# Altium PCB PCB1.PcbDoc
Units mil, origin at the board's own origin, x right, y up, seen from the top; angles counter-clockwise.
Board outline 7088 x 5017 mil, 2 copper layers (Top Layer, Bottom Layer); 122 components, 84 nets, 321 pads, 44 vias.
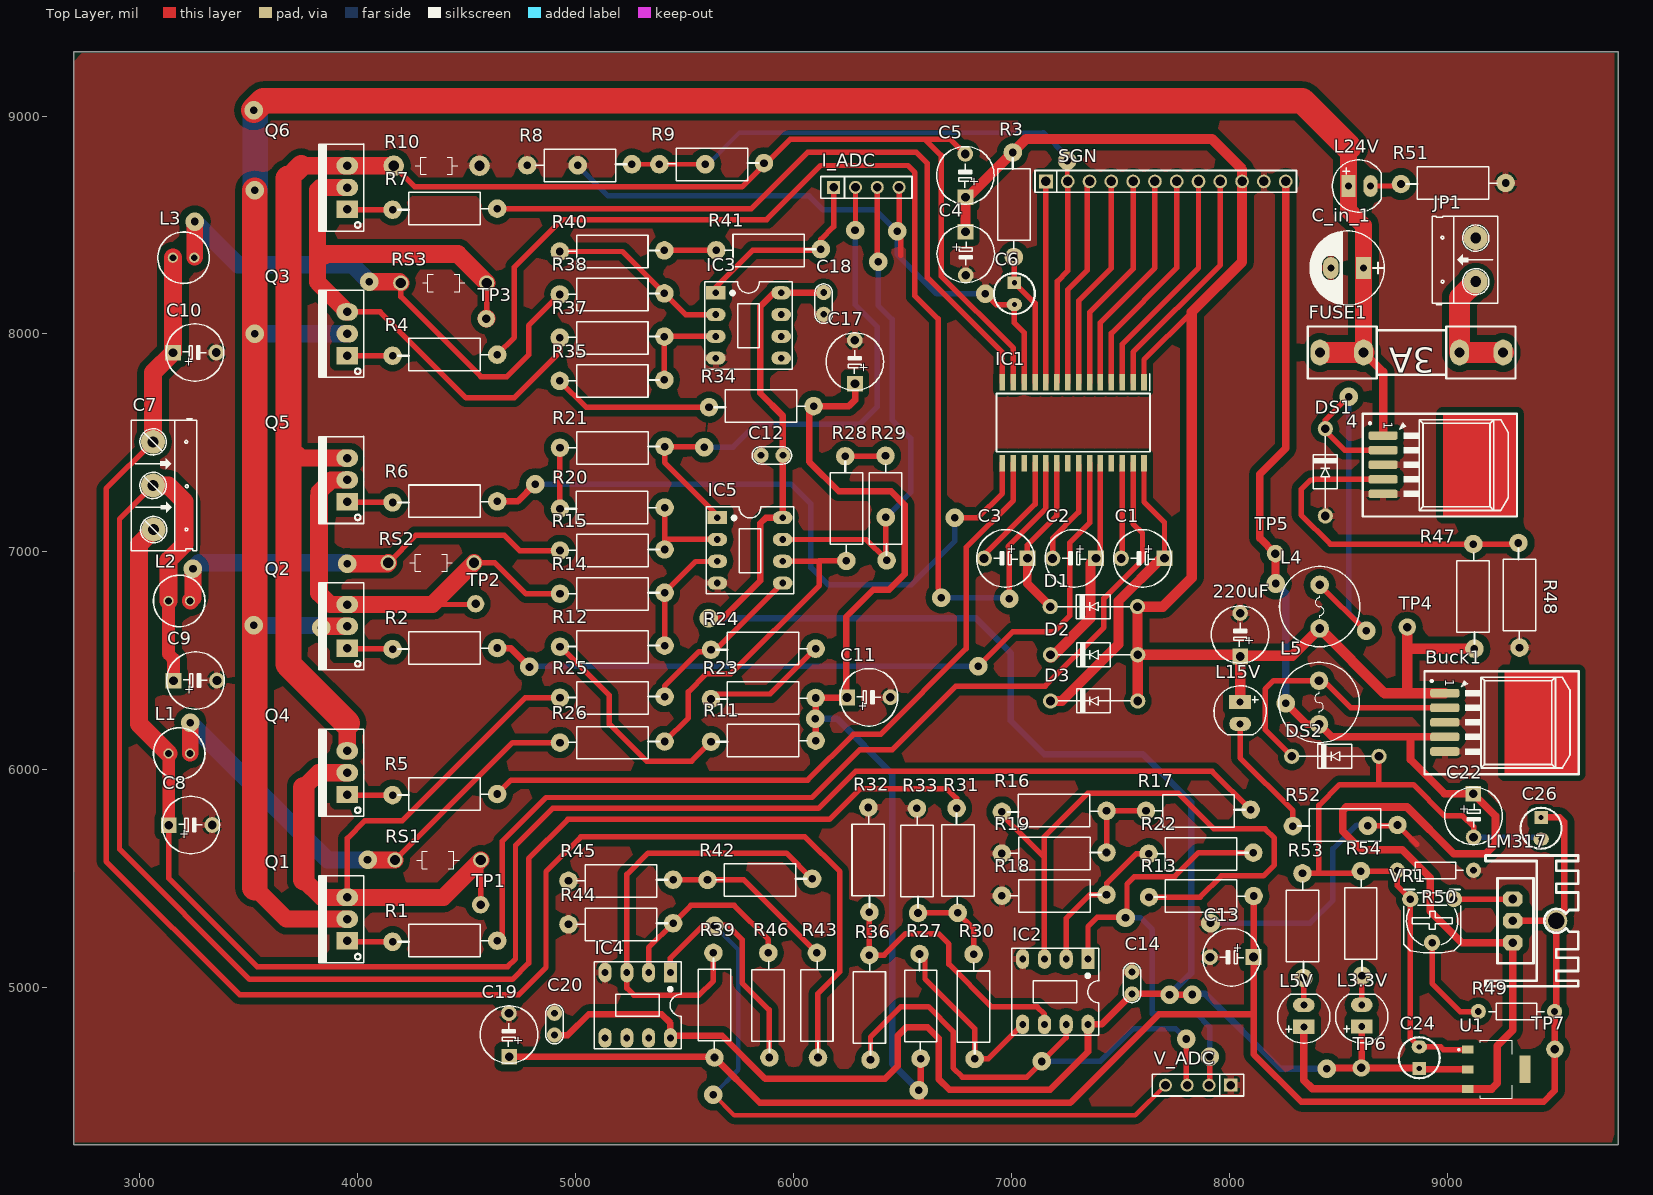
[diagram p0: Top Layer view]
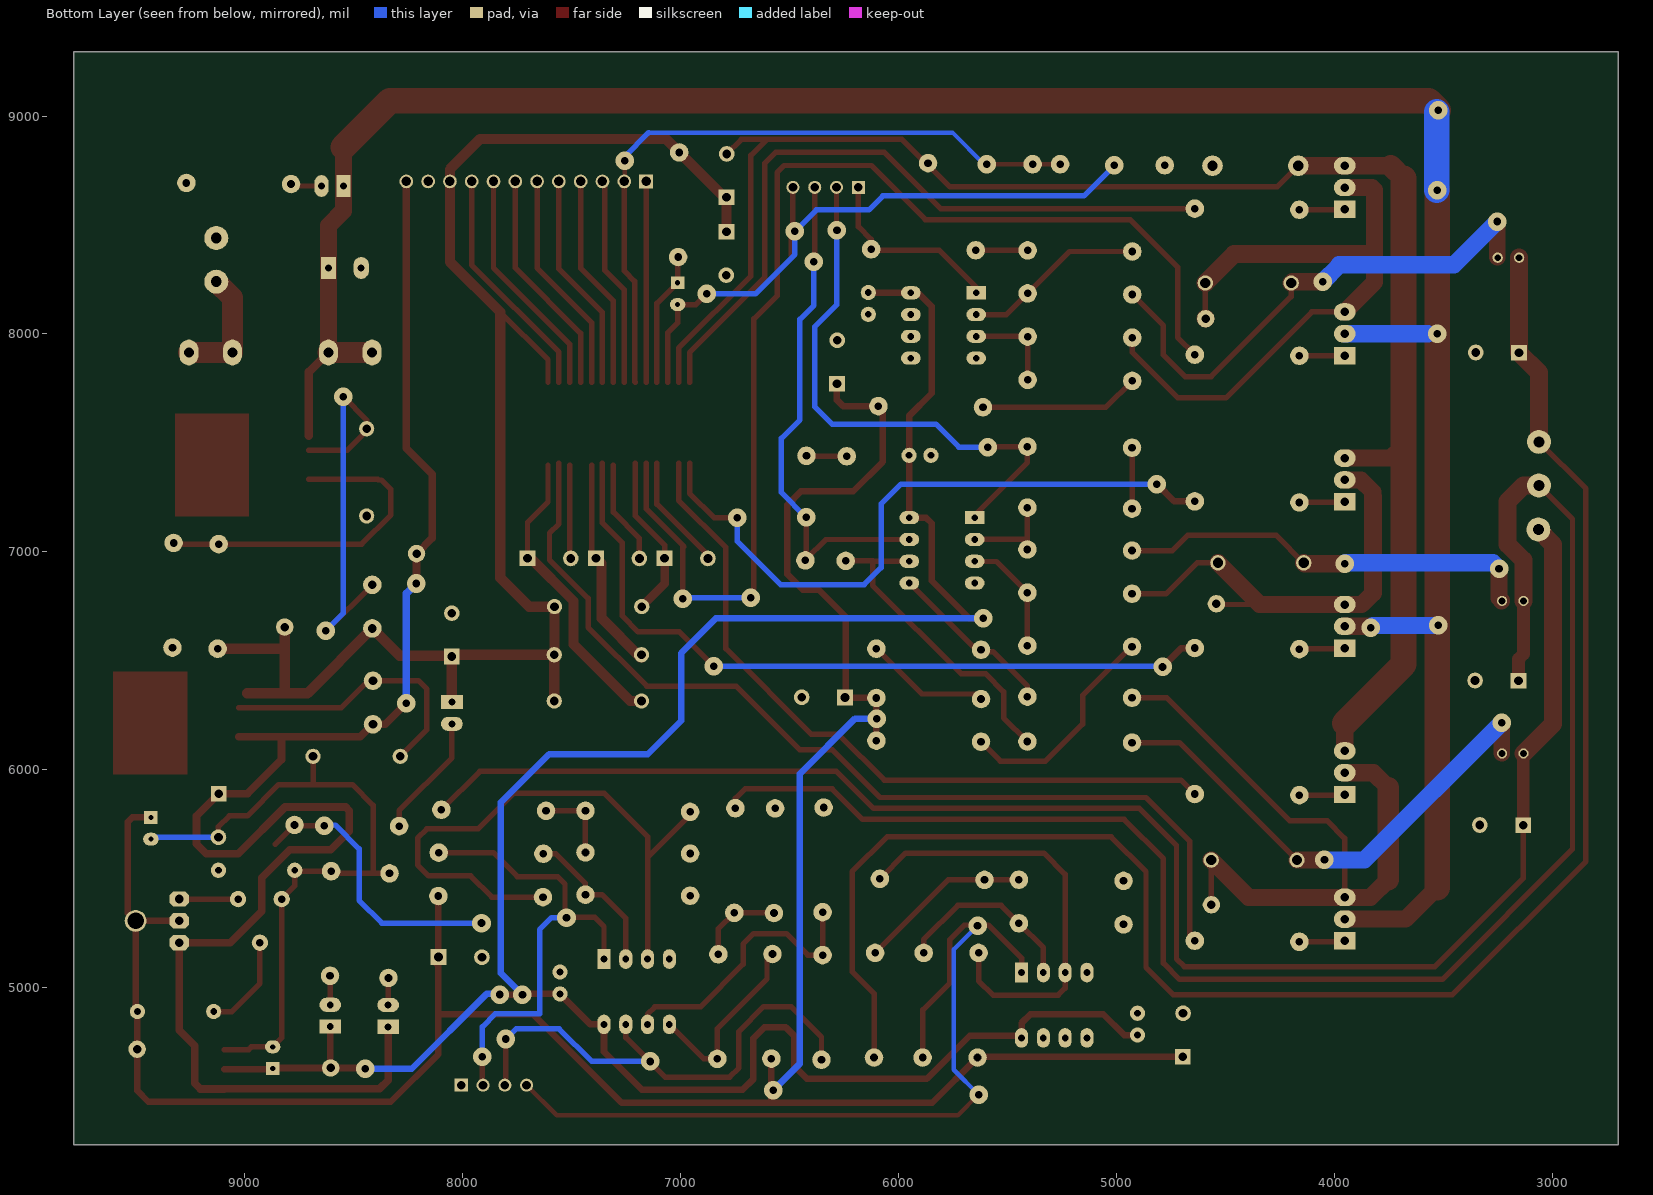
[diagram p1: Bottom Layer view, seen from below]

## Layer stack, top to bottom
Top Solder: solder mask 0.4, Solder Resist, Dk 3.5
Top Layer: signal copper 1.4
Dielectric 1: dielectric 12.6, FR-4, Dk 4.8
Bottom Layer: signal copper 1.4
Bottom Solder: solder mask 0.4, Solder Resist, Dk 3.5

## Board outline
2696,4279 2696,9296 9784,9296 9784,4279

## Design rules (kind name [scope] priority, off if disabled: settings)
Clearance [All] p1: gap=20 ignorepadtopadclearanceinfootprint=FALSE
PolygonConnect [All] p1: connectstyle=Relief reliefconductorwidth=30 reliefentries=4 polygonreliefangle="90 Angle" airgapwidth=10
RoomDefinition Source [InComponentClass('Source')] p1: confinementstyle=ConfineIn formatcopy=TRUE lockcomponents=FALSE outline 0,0 2000,0 2000,1000 0,1000
RoomDefinition Sheet2 [InComponentClass('Sheet2')] p2: confinementstyle=ConfineIn formatcopy=TRUE lockcomponents=FALSE outline 0,0 2000,0 2000,1000 0,1000
RoomDefinition Sheet1 [InComponentClass('Sheet1')] p3: confinementstyle=ConfineIn formatcopy=TRUE lockcomponents=FALSE outline 0,0 2000,0 2000,1000 0,1000
RoutingVias [All] p1: holewidth=28 width=50 viastyle="Through Hole" minholewidth=28 minwidth=50 maxholewidth=28 maxwidth=50
SolderMaskExpansion [All] p1: expansion=4
Width [All] p1: maxlimit=196.85 minlimit=20 preferedwidth=20
30 further rules are at their usual default settings.

## Classes and differential pairs
component class Source: 4 220uF Buck1 C22 C24 C26 C_in_1 DS1 DS2 FUSE1 JP1 L3.3V L4 L5 L5V L15V L24V LM317 R47 R48 R49 R50 R51 R52 R53 R54 TP4 TP5 TP6 TP7 U1 VR1
component class Sheet2: C11 C12 C13 C14 C17 C18 C19 C20 IC2 IC3 IC4 IC5 R11 R12 R13 R14 R15 R16 R17 R18 R19 R20 R21 R22 R23 R24 R25 R26 R27 R28 R29 R30 R31 R32 R33 R34 R35 R36 R37 R38 R39 R40 R41 R42 R43 R44 R45 R46
component class Sheet1: C1 C2 C3 C4 C5 C6 C7 C8 C9 C10 D1 D2 D3 IC1 L1 L2 L3 Q1 Q2 Q3 Q4 Q5 Q6 R1 R2 R3 R4 R5 R6 R7 R8 R9 R10 RS1 RS2 RS3 TP1 TP2 TP3
component class KIT_STM32F4: I_ADC SGN V_ADC

## Components (designator, comment, footprint, x,y, rotation, side; value= is the part's Value field where it differs from the comment)
4 "LM2576-ADJ" TO263 8939,7415 r270 top
220uF "CN-ALU-DIP" CA-ALU-5R 8048,6619 r90 top value=104
Buck1 "LM2576-5V" TO263 9222,6233 r270 top
C1 "50-100uF" CA-ALU-5R 7602,6970 r180 top value=104
C2 "50-100uF" CA-ALU-5R 7287.5,6970 r180 top value=104
C3 "50-100uF" CA-ALU-5R 6973,6970 r180 top value=104
C4 "to" CA-ALU-5R 6789,8370 r270 top value=104
C5 "to" CA-ALU-5R 6787,8726 r90 top value=104
C6 "1nF-2ms" CA-ALU-2.54 7012,8185 r270 top value=104
C7 "Header 3" HED3 3060,7505 r270 top
C8 "10uF" CA-ALU-5R 3231,5747 r0 top value=104
C9 "10uF" CA-ALU-5R 3253,6410 r0 top value=104
C10 "10uF" CA-ALU-5R 3250,7915 r0 top value=104
C11 "10uF" CA-ALU-5R 6343,6333 r0 top value=104
C12 "1uF" CN1 5950,7443 r180 top value=100pF
C13 "10uF" CA-ALU-5R 8010,5140 r180 top value=104
C14 "1uF" CN1 7552,4972 r90 top value=100pF
C17 "10uF" CA-ALU-5R 6280,7871 r90 top value=104
C18 "1uF" CN1 6137,8190 r270 top value=100pF
C19 "10uF" CA-ALU-5R 4693,4783 r90 top value=104
C20 "1uF" CN1 4902,4783 r90 top value=100pF
C22 ">400uF" CA-ALU-5R 9119,5791 r270 top value=104
C24 "22uF" CA-ALU-2.54 8870,4679 r90 top value=104
C26 "1uF" CA-ALU-2.54 9429,5732 r270 top value=104
C_in_1 "100->220uF" CP1.5/3.4 8614,8303 r180 top value=1000uF/16V
D1 "Diode" DIO-1A 7577,6749 r180 top value=1N5007
D2 "Diode" DIO-1A 7578,6528 r180 top value=1N5007
D3 "Diode" DIO-1A 7578,6316 r180 top value=1N5007
DS1 "Diode" DIO-1A 8439,7165 r90 top value=1N5007
DS2 "Diode" DIO-1A 8685,6062 r180 top value=1N5007
FUSE1 "F1A" Fuse1 8834,7915 r180 top value=Fuse
I_ADC "JP4" JP4-C1T 6183,8673 r0 top
IC1 "IR2136SPBF" SOIC127P1032X265-28N 7282,7593 r270 top
IC2 "LM358" DIP8 7205,4982 r180 top
IC3 "LM358" DIP8 5792,8044 r270 top
IC4 "LM358" DIP8 5289,4920 r180 top
IC5 "LM358" DIP8 5799,7012 r270 top
JP1 "Header 2_1" HED2 9129,8240 r90 top value="Header 2"
L1 "L-Filter" L-DIP-M-5.3 3180,6075 r180 top value="150 mH"
L2 "L-Filter" L-DIP-M-5.3 3180,6775 r180 top value="150 mH"
L3 "L-Filter" L-DIP-M-5.3 3200,8350 r180 top value="150 mH"
L3.3V "LED" LED-5-BLUE 8606,4867 r90 top value="LED 3 ly Single Colour"
L4 "100uH" L01 8413,6749 r270 top value="150 mH"
L5 "" L01 8410,6309 r270 top value="150 mH"
L5V "LED" LED-5-BLUE 8340,4866 r90 top value="LED 3 ly Single Colour"
L15V "LED" LED-5-BLUE 8048,6266 r270 top value="LED 3 ly Single Colour"
L24V "LED" LED-5-BLUE 8591,8679 r0 top value="LED 3 ly Single Colour"
LM317 "LM317-ADJ" TO220H3 9299,5407 r270 top value=LM317
Q1 "IRF840" TO220-123 3951,5215 r90 top
Q2 "IRF840" TO220-123 3951,6558.6 r90 top
Q3 "IRF840" TO220-123 3951,7901 r90 top
Q4 "IRF840" TO220-123 3951,5886.8 r90 top
Q5 "IRF840" TO220-123 3951,7230.4 r90 top
Q6 "IRF840" TO220-123 3951,8572 r90 top
R1 "10->20 Ohm" RES-1/2W 4379,5216 r0 top
R2 "1K10->20 Ohm" RES-1/2W 4379,6559 r0 top
R3 "2MOhm 2ms" RES-1/2W 7010,8613 r270 top
R4 "10->20 Ohm" RES-1/2W 4379,7905 r0 top
R5 "10->20 Ohm" RES-1/2W 4379,5889 r0 top
R6 "10->20 Ohm" RES-1/2W 4379,7232 r0 top
R7 "10->20 Ohm" RES-1/2W 4379,8575 r0 top
R8 "10k" RES-1/2W 5037,8774 r180 top
R9 "0" RES-1/2W 5643,8779 r180 top
R10 "1-1625873-0" *RESAD640W45L370D200#1 4361,8772 r180 top
R11 "100k" RES-1/2W 5840,6134 r0 top
R12 "100k" RES-1/2W 5187,6565 r180 top
R13 "220k" RES-1/2W 7850,5421 r0 top
R14 "10k" RES-1/2W 5187,6807.91 r180 top
R15 "10K" RES-1/2W 5187,7006.28 r180 top
R16 "100k" RES-1/2W 7175,5812 r0 top
R17 "3K" RES-1/2W 7876,5812 r180 top
R18 "220k" RES-1/2W 7215,5422.19 r180 top
R19 "1K" RES-1/2W 7215,5616 r180 top
R20 "100k" RES-1/2W 5147,7203.45 r0 top
R21 "100k" RES-1/2W 5187,7478 r180 top
R22 "100k" RES-1/2W 7888,5615 r180 top
R23 "100k" RES-1/2W 5840,6329.81 r0 top
R24 "100k" RES-1/2W 5840,6556 r0 top
R25 "10k" RES-1/2W 5187,6331 r180 top
R26 "10K" RES-1/2W 5187,6125 r180 top
R27 "220k" RES-1/2W 6582,4935 r270 top
R28 "100k" RES-1/2W 6241,7219 r270 top
R29 "100k" RES-1/2W 6421,7181 r90 top
R30 "100k" RES-1/2W 6825,4894 r90 top
R31 "3K" RES-1/2W 6752,5604 r270 top
R32 "220k" RES-1/2W 6342,5567 r90 top
R33 "1K" RES-1/2W 6565,5563 r90 top
R34 "100k" RES-1/2W 5831,7669 r0 top
R35 "100k" RES-1/2W 5186,7784.55 r180 top
R36 "100k" RES-1/2W 6347,4890 r90 top
R37 "10k" RES-1/2W 5186,7982.91 r180 top
R38 "10K" RES-1/2W 5186,8181.28 r180 top
R39 "220k" RES-1/2W 5636,4940 r270 top
R40 "100k" RES-1/2W 5186,8378.45 r180 top
R41 "100k" RES-1/2W 5904,8384 r180 top
R42 "100k" RES-1/2W 5864,5495 r180 top
R43 "3K" RES-1/2W 6106,4900 r90 top
R44 "220k" RES-1/2W 5226,5291 r180 top
R45 "1K" RES-1/2W 5226,5490.59 r180 top
R46 "100k" RES-1/2W 5883,4900 r90 top
R47 "20-24" RES-1/2W 9118,6776 r90 top
R48 "2" RES-1/2W 9330,6821 r270 top
R49 "1k" R1/4W 9141,4891 r0 top value="R1/4W - 1K"
R50 "0R" R1/4W 8769,5539 r0 top value="R1/4W - 1K"
R51 "Res" RES-1/2W 9006,8693 r0 top
R52 "Res" RES-1/2W 8510,5747 r0 top
R53 "Res" RES-1/2W 8334,5265 r90 top
R54 "Res" RES-1/2W 8602,5275 r90 top
RS1 "1-1625873-0" *RESAD640W45L370D200#2 4367,5586 r180 top
RS2 "1-1625873-0" *RESAD640W45L370D200#2 4336,6950 r180 top
RS3 "1-1625873-0" *RESAD640W45L370D200#2 4394,8234 r180 top
SGN "JP12" JP12-D1T 7157,8700 r0 top
TP1 "" TP 4563,5381 r90 top
TP2 "" TP 4540,6762 r90 top
TP3 "" TP 4589,8070 r270 top
TP4 "" TP 8815,6655 r90 top
TP5 "" TP 8210,6992 r0 top
TP6 "" TP 8604,4632 r0 top
TP7 "" TP 9492,4718 r0 top
U1 "AMS1117-3.3" *SOT229P700X180-4N 9224,4626 r270 top
V_ADC "JP4" JP4-C1T 8005,4553 r180 top
VR1 "10K" VR-S2 9029,5407 r180 top value="Volume 50k"

## Footprints (in the part's own frame and the unit in brackets; to place one, negate y for a bottom-side part, rotate by r counter-clockwise, add the part's x,y. Pads: shape width x height; smd on the part's side, far side on the other; paste and mask are expansions set on the pad)
*RESAD640W45L370D200#1 [mm]
  round 2.4 hole 1.2: 1(-5,0) 2(5,0)
  silkscreen extent -2.47,-1 2.47,1
*RESAD640W45L370D200#2 [mm]
  round 1.8 hole 1.2: 1(-5,0) 2(5,0)
  silkscreen extent -2.47,-1 2.47,1
*SOT229P700X180-4N [mm]
  rect 0.93x1.31 smd: 1(-2.29,-3.345) 2(0,-3.345) 3(2.29,-3.345)
  rect 3.24x1.31 smd: 4(0,3.345)
  silkscreen extent -3.36,-4.47 3.36,1.86
CA-ALU-2.54 [mm]
  rect 1.5x1.58 hole 0.6: 1(-1.27,0)
  oval 1.5x1.8 hole 0.6: 2(1.27,0)
  silkscreen extent -2.39,-2.39 2.39,2.39, body extent -2,-2.03 1.99,1.97, height 7.01
CA-ALU-5R [mil]
  rect 72x72 hole 40: 1(-99,-1)
  round 72 hole 40: 2(100,0)
  silkscreen extent -130,-132 134,132, body extent -108,-98 108,98, height 551
CN1 [mil]
  round 70 hole 31: 1(0,0) 2(100,0)
  silkscreen extent -40,-40 141,40, body extent -60,-30 170,37, height 265
CP1.5/3.4 [mil] "Tu hoa 220->470uF,16V, 470uF/16V,25V"
  rect 70x100 hole 32: 1(0,0)
  oval 70x100 hole 32: 2(150,0)
  silkscreen extent -95,-170 245,170, body extent -85,-157 230,157, height 446
DIO-1A [mil]
  round 70 hole 40: 1(0,0) 2(400,0)
  silkscreen extent 35,-55 365,55, body extent -11,-50 411,54, height 102
DIP8 [mil] "DIP, 8-Leads, Row Spacing 7.62mm, Pitch 2.54mm, Body 9.91x6.73mm"
  rect 60x90 hole 31: 1(-145,-150)
  oval 60x90 hole 31: 2(-45,-150) 3(55,-150) 4(155,-150) 5(155,150) 6(55,150) 7(-45,150) 8(-145,150)
  silkscreen extent -195,-200 205,200, body extent -213,-153 213,153, height 177
Fuse1 [mm]
  oval 2.2x3 hole 1.2: 1(-10.684,0) 1(-5.604,0) 2(5.579,0) 2(10.659,0)
  silkscreen extent -12.12,-3.05 12.09,3.05, body extent -10.84,-2.95 10.87,2.95, height 9.75
HED2 [mil] "Header 2, 2 pin, hight 300mil, Pin to Pin 200, Colour Green"
  round 110 hole 50: 1(0,0) 2(200,0)
  silkscreen extent -106,-100 300,200, body extent -92,-140 302,155, height 394
HED3 [mil] "Header 3, 3 pin, hight 300mil, Pin to Pin 200, Colour Green"
  round 110 hole 50: 1(0,0) 2(200,0) 3(402.62,2.62)
  silkscreen extent -106,-100 500,200
JP4-C1T [mm] "4 row, straight, gold plating"
  rect 1.52x1.52 hole 1.02: 1(0,0)
  round 1.52 hole 1.02: 2(2.54,0) 3(5.08,0) 4(7.62,0)
  silkscreen extent -1.52,-1.27 9.14,1.27, body extent -1.52,-1.25 9.14,1.25, height 8.51
JP12-D1T [mm] "12 pins, 1 row, straight, gold plating"
  rect 1.6x1.6 hole 1.1: 1(0,0)
  round 1.6 hole 1.1: 2(2.54,0) 3(5.08,0) 4(7.62,0) 5(10.16,0) 6(12.7,0) 7(15.24,0) 8(17.78,0) 9(20.32,0) 10(22.86,0) 11(25.4,0) 12(27.94,0)
  silkscreen extent -1.27,-1.27 29.21,1.27, body extent -1.27,-1.27 29.21,1.27, height 8.54
L01 [mil] "Inductor"
  round 85 hole 40: 1(-100,0) 2(100,0)
  silkscreen extent -184,-184 184,184
L-DIP-M-5.3 [mm] "THT Inductor, 2-Leads, Body 5.3  mm"
  round 1.2 hole 0.8: 1(-1.25,0) 2(1.25,0)
  silkscreen extent -3,-3 3,3, body extent -2.44,-2.44 2.44,2.45, height 7.6
LED-5-BLUE [mil] "LED 2 PIN, 5 ly , Only colour, pin to pin 110mil"
  rect 65x100 hole 32: 1(-45,0)
  oval 65x100 hole 32: 2(55,0)
  silkscreen extent -120,-120 104,120, body extent -113,-120 100,117, height 339
R1/4W [mil] "R 1/4W, 2 Pin, 350mil"
  round 70 hole 31: 1(0,0) 2(350,0)
  silkscreen extent 48,-38 302,38, body extent -40,-47 386,47, height 111
RES-1/2W [mil]
  round 85 hole 35: 1(-220,-5) 2(260,0)
  silkscreen extent -195,-74 221,75, body extent -230,-60 270,56, height 121
SOIC127P1032X265-28N [mm]
  rect 1.925x0.65 smd: 1(-4.712,8.255) 2(-4.712,6.985) 3(-4.712,5.715) 4(-4.712,4.445) 5(-4.712,3.175) 6(-4.712,1.905) 7(-4.712,0.635) 8(-4.712,-0.635) 9(-4.712,-1.905) 10(-4.712,-3.175) 11(-4.712,-4.445) 12(-4.712,-5.715) 13(-4.712,-6.985) 14(-4.712,-8.255) 15(4.712,-8.255) 16(4.712,-6.985) 17(4.712,-5.715) 18(4.712,-4.445) 19(4.712,-3.175) 20(4.712,-1.905) 21(4.712,-0.635) 22(4.712,0.635) 23(4.712,1.905) 24(4.712,3.175) 25(4.712,4.445) 26(4.712,5.715) 27(4.712,6.985) 28(4.712,8.255)
  silkscreen extent -5.68,-8.95 3.4,8.95, body extent -5.16,-8.95 5.16,8.95, height 2.65
TO220-123 [mil] "TO-220 - 1-2-3"
  rect 80x100 hole 39: 1(0,0)
  oval 80x100 hole 39: 2(100,0) 3(200,0)
  silkscreen extent -100,-76 300,130, body extent -95,-80 295,97, height 323
TO220H3 [mil] "TO-220 1-2-3"
  oct 70x90 hole 40: 1(0,0) 2(100,0) 3(200,0)
  round 100 hole 75: 2(100,200)
  silkscreen extent -200,-125 400,300, body extent -190,-102 392,323, height 984
TO263 [mm]
  rrect50% 1x3.4 smd: 1(-3.019,-5.969) 2(-1.319,-5.969) 4(2.081,-5.969) 5(3.781,-5.969)
  rrect50% 1x3.4 smd mask+0: 3(0.381,-5.969)
  Top Layer region: -5.568,1.016 6.432,1.016 6.432,9.65 -5.568,9.65
  silkscreen extent -5.57,-8.35 6.43,9.65, body extent -4.73,-6.84 5.43,7.8, height 4.57
TP [mil] "Connect 1"
  round 80 hole 39: TP1(0,0)
  body extent -50,-50 50,50, height 179
VR-S2 [mil] "Resistor Variable"
  round 75 hole 35: 1(0,0) 2(100,200) 3(200,0)
  silkscreen extent -31,-44 231,246, body extent -87,-30 307,372, height 165

## Part data
4 Buck1: library part LM2576, Max Input Voltage="12 V", Max Output Current="3 (6.0 peak) A", Max Output Voltage=mV, Temperature Range="-40 to +125 degC", Category=IC-Power, Min Input Voltage=mV, Min Output Voltage=mV, Mounting Technology="Surface Mount", Status=Unreleased, Supply Voltage=mV
220uF: "Capacitor (Semiconductor SIM Model)", LatestRevisionDate=17-Jul-2002, LatestRevisionNote="Re-released for DXP Platform.", PackageReference=C1206, Publisher="Altium Limited"
C1 C2 C3 C4 C5 C6 C8 C9 C10 C11 C13 C17 C19 C22 C24 C26: library part CN-ALU-DIP, "Capacitor (Semiconductor SIM Model)", LatestRevisionDate=17-Jul-2002, LatestRevisionNote="Re-released for DXP Platform.", PackageReference=C1206, Publisher="Altium Limited"
C7: library part Hed3, "Header 3 (Green)"
C12 C14 C18 C20: library part CN1, "Cap np  1pF - 472pF"
C_in_1: library part CP4, "Cap 1000uF/16V - 220uF/50V", Description 1="2200uF-3300uF/6,3V - 1000uF-2200uF/10V", Description 2="1000uF/16V - 470uF => 1000uF/25V - 100uF/100V", Description 3=330uF>470uF/35V_220uF>470uF/50V_10uF>22uF/250V, Description 4="220uF => 330uF/63V - 10uF =>33uF/160 - 200V", Description 5="4,7uF>10uF/250V_3,3uF>10uF/400V - 2,2uF>4,7uF/450V"
D1 D2 D3 DS1 DS2: "Default Diode", Code - JEDEC=DO-214-AB, Published=8-Jun-2000, Publisher="Altium Limited", Revision="July-2002: Re-released for DXP Platform."
FUSE1: library part Fuse, "Fuse", Designed by=VanDungEvn
I_ADC V_ADC: "WR-PHD 2.54 mm Angled Socket Header", Manufacturer="Würth Elektronik eiSos GmbH", partNo=613004143121, ComponentLink1 Description=Manufacturer, ComponentLink1URL=http://www.we-online.com, ComponentLink2 Description=Datasheet, ComponentLink2URL=http://katalog.we-online.de/em/datasheet/6130xx143121.pdf, Created by="Karrer Zheng", Created Date="29 March 2013", NoPins=04
IC1: "Integrated Circuit", Manufacturer_Name=Infineon, Mouser Part Number=942-IR2136SPBF, RS Part Number=5412284P, Allied_Number=70017147, Allied Price/Stock=https://www.alliedelec.com/infineon-ir2136spbf/70017147/, Datasheet Link=https://www.infineon.com/dgdl/ir2136.pdf?fileId=5546d462533600a4015355c8a02116a5, Height=2.65mm, Manufacturer_Part_Number=IR2136SPBF, Mouser Price/Stock=https://www.mouser.co.uk/ProductDetail/Infineon-IR/IR2136SPBF?qs=ellYJlE8XiFRzygBXfcgZw%3D%3D, RS Price/Stock=http://uk.rs-online.com/web/p/products/5412284P
IC2 IC3 IC4 IC5: "Low-Power Dual Operational Amplifier"
JP1: "Header, 2-Pin", Manufacturer="Generic Components", Class=Connector
L1 L2 L3: library part L-DIP-1, "Inductor"
L3.3V L5V L15V L24V: "LED Single colour Green and Red"
L4 L5: library part L1, "Inductor"
LM317: library part LM317, "Adj Voltage +1.2 -> +37V"
Q1 Q2 Q3 Q4 Q5 Q6: "MOSFET N - CHANNEL 500V - 0.75 - 8A - TO-220"
R1 R2 R3 R4 R5 R6 R7 R8 R9 R11 R12 R13 R14 R15 R16 R17 R18 R19 R20 R21 R22 R23 R24 R25 R26 R27 R28 R29 R30 R31 R32 R33 R34 R35 R36 R37 R38 R39 R40 R41 R42 R43 R44 R45 R46 R47 R48: library part Res, "Res", Manufacturer="Generic Components", Class=Passive, Published=08/06/2000, Publisher="Altium Hobart Technology Centre", SubClass=R
R10 RS1 RS2 RS3: library part RES_KIT_LR0204R, "RS LR0204 RESISTOR KIT", Package=None, Availability=Unavailable, MF="TE Connectivity AMP Connectors", MP="RES KIT LR0204R", Price=None, SnapEDA_Link=https://www.snapeda.com/parts/RES%20KIT%20LR0204R/TE%20Connectivity/view-part/3223324/?ref=snap, TE_purchase_URL=https://www.te.com/usa-en/product-1-1625873-0.html?te_bu=Cor&te_type=disp&te_campaign=seda_glo_cor-seda-global-disp-prtnr-fy19-seda-model-bom-cta_sma-317_1&elqCampaignId=32493
R49 R50: library part R1/4W, "Resistor 1/4W"
R51 R52 R53 R54: Manufacturer="Generic Components", Class=Passive, Published=08/06/2000, Publisher="Altium Hobart Technology Centre", SubClass=R
SGN: "WR-PHD 2.54 mm Angled Socket Header", Manufacturer="Würth Elektronik eiSos GmbH", partNo=613012143121, ComponentLink1 Description=Manufacturer, ComponentLink1URL=http://www.we-online.com, ComponentLink2 Description=Datasheet, ComponentLink2URL=http://katalog.we-online.de/em/datasheet/6130xx143121.pdf, Created by="Karrer Zheng", Created Date="29 March 2013", NoPins=12
TP1 TP2 TP3 TP4 TP5 TP6 TP7: library part TP, "CONNECT 1"
U1: "Sot223/Pkg 1-Amp 3.3-Volt Low Drop Out Voltage Regulatator", Package=None, Availability=Unavailable, MF="Advanced Monolithic Systems", MP=AMS1117-3.3, Price=None, SnapEDA_Link=https://www.snapeda.com/parts/AMS1117-3.3/Advanced%20Monolithic%20Systems/view-part/53450/?ref=snap
VR1: library part VR-S, "Var Resistor"

## Via types
v1: diameter 85, hole 35, Top Layer to Bottom Layer, 44 vias

## Nets (pads, with @x,y where several pads share a name; then routed paths per layer and width w, separated by ;. In a path a pad name is that pad's centre, name@x,y a point inside that pad or via, vN(x,y) a via of type N, cw(c..) or ccw(c..) an arc to the next point about the centre after c; other vN are vias at no path point)
1.6V: C11.1 C13.1 C17.1 C19.1 C26.1 LM317.2 R11.2 R13.2 R23.2 R27.2 R34.2 R39.2 R49.2 TP7.TP1 | length 12049.8
  Top Layer w30: C19.1 5632,4684 R39.2 5843.5,4472.5 6582,4472.5 ; R11.2@6100,6145.41 R23.2 6240.19,6329.81 6241,6330.62 6241,6702 6365,6826 6437,6826 6508.5,6897.5 6508.5,7215.5 6446,7278 6206,7278 6071,7413 6071,7649 R34.2 6253,7669 6281,7697 C17.1 ; R27.2 6582,4472.5 ; R13.2 8110,5115 C13.1@8111,5114 ; 8111,4869 8111,4694 8328,4477 9441,4477 9491,4527 R49.2 9499,4899 LM317.2@9499,5307 ; LM317.2@9299,5307 LM317.2@9499,5307 ; C26.1 9514,5782 9535,5761 9535,5343 LM317.2@9499,5307 ; 6582,4472.5 7269.5,4472.5 7675,4878 8111,4878 C13.1@8111,5108.52 ; C13.1@8111,5108.52 8116.48,5108.52 C13.1@8111,5114 ; C13.1@8111,5108.52 C13.1@8111,5114
  Bottom Layer w30: v1(6098,6235) 6198,6235 6451,5982 6451,4652 v1(6574,4529)
3.3V: C12.1 C14.1 C18.1 C20.1 C24.1 IC2.8 IC3.8 IC4.8 IC5.8 L3.3V.1 TP6.TP1 U1.2 | length 11111.5
  Top Layer w30: C20.1 4963,4783 5059,4879 5393,4879 5434,4838 IC4.8 5444,4780 5671.33,4780 5868.33,4583 6419,4583 6476,4640 6476,4779 6515,4818 6615,4818 6664.5,4768.5 6664.5,4581.5 6713,4533 7177,4533 7350,4706 IC2.8 7412,4832 C14.1 7720,4972 v1(7724,4968) 7828,4968 v1(7829,4969) ; v1(5610,6696) 5674,6696 5846,6868 5846,7131 5872,7157 IC5.8 5950,7158 C12.1 5950,7624 5846,7728 5846,8126 5909,8189 IC3.8 6136,8189 C18.1 ; v1(8445,4629) 8448,4632 TP6.TP1 8869,4632 8870,4633 8877,4626 U1.2 ; TP6.TP1@8604,4641 8606,4643 L3.3V.1
  Bottom Layer w30: v1(5610,6696) 6836,6696 6996,6536 6996,6225 7149,6072 7602,6072 7823,5851 7823,5067 v1(7724,4968) ; IC5.8@5935.01,7157 IC5.8 ; C18.1 C18.1@6152,8190 ; v1@7823,4972 7889,4972 8232,4629 v1(8445,4629)
5V: Buck1.4 C22.1 L5.2 L5V.1 LM317.3 SGN.12 TP5.TP1 U1.3 | length 7890.2
  Top Layer w35: v1(8211,6855) 8210,6856 TP5.TP1 8138,7064 8138,7357 8257,7476 SGN.12 ; v1(8257,6305) 8353,6209 L5.2 8467.93,6151.07 8830,6151.07 ; L5V.1 8340,4576 8380,4536 U1.3@9102,4536 ; Buck1.4@9025,6151.07 Buck1.4 8830,6151.07 ; U1.3 9201.84,4535.84 9228,4562 9228,4734 9299,4805 LM317.3 9065,5207 8921,5351 8921,5504 8791,5634 8604,5634 8519,5719 8519,5813 8535.5,5829.5 8813.65,5829.5 9028.15,5615 9174,5615 9220,5661 9220,5788 C22.1 8986,5890 8830,6046 8830,6151.07
  Bottom Layer w35: v1(8211,6855) 8257,6809 v1(8257,6305)
15V: 220uF.1 Buck1.1 C4.1 C5.1 D1.1 D2.1 D3.1 IC1.1 L4.2 L15V.1 R3.1 R47.1 SGN.10 TP4.TP1 | length 7122.4
  Top Layer w25: IC1.1 7607,7882 7826,8101
  Top Layer w47.24: C4.1 C5.1 6799,8627 R3.1 7066.88,8894.88 7917.12,8894.88 8057,8755 SGN.10 8057,8332 7826,8101 7826,6882 7693,6749 D1.1 7577,6529 D2.1 ; D3.1 D2.1 ; L15V.1@8043,6316 L15V.1 8049,6312 220uF.1 ; 8815,6366.86 8815,6548 ; TP4.TP1 8815,6548 ; Buck1.1 8710.14,6351.86 L4.2 8288,6524 8049,6524 220uF.1 ; R47.1 8823,6556 8815,6548 ; D2.1 8041,6528 220uF.1
24V: 4.1 C_in_1.1 FUSE1.2 L24V.1 Q1.2 Q2.2 Q3.2 | length 11578.8
  Top Layer w39.37: FUSE1.2@8614.37,7915 8704,7825.37 4.1
  Top Layer w78.74: 3527,5460 3672,5315 Q1.2 ; v1(3831,6652) 3837.6,6658.6 Q2.2 ; 8546,8857 L24V.1 8546,8565 8614,8497 C_in_1.1@8614,8322 ; C_in_1.1 C_in_1.1@8614,8322 ; FUSE1.2@8614.37,7915 8614.37,8321.63 C_in_1.1@8614,8322
  Top Layer w98.43: FUSE1.2@8430,7915 FUSE1.2@8614.37,7915
  Top Layer w118.11: v1(3522,9026) 3566,9070 8333,9070 8546,8857 ; 3527,5460 v1(3527,8001) ; v1@3527,8005 v1(3527,8660)
  Bottom Layer w78.74: v1(3522,6663) 3820,6663 v1(3831,6652) ; 3570,8001 Q3.2
  Bottom Layer w118.11: v1@3529,8660 v1@3529,9019
GND: 4.3 4.5 220uF.2 Buck1.3 Buck1.5 C4.2 C6.2 C8.2 C9.2 C10.2 C11.2 C12.2 C13.2 C14.2 C17.2 C18.2 C19.2 C20.2 C_in_1.2 DS1.1 I_ADC.4 IC1.12 IC2.4 IC3.4 IC4.4 IC5.4 JP1.2 R8.2 R10.1 R18.2 R19.2 R32.2 R33.2 R44.2 R45.2 R48.2 R50.2 R51.2 R52.2 SGN.11 V_ADC.1 | length 4334.8
  Top Layer w25: I_ADC.4 6483,8480 v1(6474,8471) 6491,8454 6491,8361 ; v1(6879,8184) 6928,8135 C6.2 7012,8051 7057,8006 IC1.12 ; v1(8634,5743) 8766,5743 R52.2 8859,5658
  Bottom Layer w25: v1(5008,8774) 5148,8634 6070,8634 6134,8570 6375,8570 v1(6474,8471) 6474,8365 6655,8184 v1(6879,8184) ; v1(7912,5297) 8369,5297 8473,5401 8473,5637 8583,5747 v1@8630,5747
GND_1: C22.2 C24.2 C26.2 DS2.1 R50.1 R53.2 R54.2 U1.1 VR1.3 | length 3159.4
  Top Layer w25: R53.2 8409,5525 ; DS2.1 8685,5940 8677,5932 ; U1.1 8980.84,4716.16 8968,4729 C24.2 8829,4770 VR1.3 8769,5467 R50.1 8769,5541 8763,5535 R54.2 8592,5525 8409,5525 ; C22.2 9119,5739 9069,5789 8986,5789 8843,5932 8677,5932 ; 8409,5525 8409,5837 8504,5932 8677,5932
  Bottom Layer w25: C22.2 9420,5691 C26.2
Net4_2: 4.2 DS1.2 L4.1 | length 1908.9
  Top Layer w25: L4.1 8623,6639 v1(8626,6639) ; v1(8546,7712) 8439,7605 DS1.2 8439,7555 8527.07,7466.93 4.2
  Bottom Layer w25: v1(8546,7712) 8546,6719 v1(8626,6639)
Net4_4: 4.4 R47.2 R48.1 | length 1567.1
  Top Layer w25: 4.4 8388.07,7333.07 8385,7330 8371,7330 8327.5,7286.5 8327.5,7170.43 8461.93,7036 R47.2 9320,7036 R48.1
NetBuck1_2: Buck1.2 DS2.2 L5.1 | length 1282.2
  Top Layer w25: DS2.2 8163,6184 8163,6371 8201,6409 L5.1 ; L5.1@8421,6420 8556.07,6284.93 Buck1.2 Buck1.2@9025,6284.93
NetC1_1: C1.1 D3.2 IC1.28 | length 1380.6
  Top Layer w25: IC1.28@7607,7397 7607,7230 7701,7136 C1.1
  Top Layer w47.24: D3.2@7173,6316 D3.2 7230,6316 7490,6576 7490,6774.63 7686.37,6971 C1.1
NetC1_2: C1.2 IC1.26 | length 429.1
  Top Layer w25: C1.2 7507,6975 IC1.26@7507,7397
NetC2_1: C2.1 D2.2 IC1.24 | length 982.8
  Top Layer w25: C2.1 7407,6991.5 IC1.24@7407,7397
  Top Layer w47.24: D2.2@7173,6517 7183,6517 7361,6695 7361,6945.5 C2.1
NetC2_2: C2.2 IC1.22 | length 476.5
  Top Layer w25: C2.2 7187.5,7062.5 7307,7182 IC1.22@7307,7397
NetC3_1: C3.1 D1.2 IC1.20 | length 757.9
  Top Layer w25: C3.1 7072,7031 7207,7166 IC1.20
  Top Layer w39.37: C3.1 7072,6854 D1.2
NetC3_2: C3.2 IC1.18 | length 534.4
  Top Layer w25: C3.2 6873,6985 7107,7219 IC1.18
NetC5_2: C5.2 IC1.13 Q4.3 Q5.3 Q6.3 R9.1 R10.2 | length 7537.7
  Top Layer w25: R10.2 4261.15,8675 5762,8675 R9.1@5867,8780 ; R9.1@5868.5,8778.5 5983,8893 6603,8893 ; C5.2 6720,8893 6603,8893 ; IC1.13 7007,7934.71 6676,8265.71 6676,8820 6603,8893
  Top Layer w78.74: 3727,7445 3741.6,7430.4 Q5.3 ; 3740,8772 Q6.3 R10.2 ; Q4.3 3951,6214
  Top Layer w98.43: 3681,8713 3740,8772
  Top Layer w118.11: 3681,8713 3681,6484 3951,6214
NetC6_1: C6.1 IC1.11 R3.2 | length 614.7
  Top Layer w25: R3.2 7012,8351 C6.1 7107,8140 IC1.11
NetC7_1: C7.1 C10.1 L3.2 R43.1 | length 8008.3
  Top Layer w25: C7.1 2845,7290 2845,5580 3458,4967 4737,4967 4863,5093 4863,5533 5023,5693 6051,5693 6211,5533 6211,5074 6110,4973 R43.1@6110,4708
  Top Layer w82.68: C7.1 3060,7823 C10.1 3151,8349.79 L3.2
NetC7_2: C7.2 C9.1 L2.2 R31.1 | length 7564.1
  Top Layer w25: C7.2 2906,7151 2906,5636 3503,5039 4709,5039 4783,5113 4783,5593 4963,5773 6163,5773 6303,5913 6703,5913 6747,5869 R31.1
  Top Layer w59.06: L2.2 3130.79,6531.21 3154,6508 C9.1
  Top Layer w82.68: C7.2 3130,7305 3204,7231 3204,7035 3130.79,6961.79 L2.2
NetC7_3: C7.3 C8.1 L1.2 R17.1 | length 7567.3
  Top Layer w25: C8.1 3132,5502 3537,5097 4687,5097 4723,5133 4723,5653 4893,5823 6113,5823 6283,5993 7920,5993 R17.1
  Top Layer w59.06: L1.2 3132,6073.79 C8.1
  Top Layer w82.68: C7.3 2995,7034.76 2995,6210.79 L1.2
  Bottom Layer w25: C8.1@3130.79,5747.21 C8.1
NetFUSE1_1: FUSE1.1 JP1.1 | length 555.8
  Top Layer w98.43: JP1.1 9054.63,8165.63 9054.63,7915 FUSE1.1@9254.63,7915
NetI_ADC_1: I_ADC.1 IC3.1 R41.1 | length 888.5
  Top Layer w25: IC3.1 5642,8215 5812,8385 6120,8385 R41.1 6124,8434 6183,8493 I_ADC.1
NetI_ADC_2: I_ADC.2 IC5.1 R21.1 | length 2509
  Top Layer w25: v1(5589,7481) 5587,7483 R21.1 5407,7411 IC5.1@5643,7175 ; v1(6281,8476) 6283,8478 I_ADC.2
  Bottom Layer w25: v1(5589,7481) 5722,7481 5827.5,7586.5 6303,7586.5 6383,7666.5 6383,8033 6281,8135 v1(6281,8476)
NetI_ADC_3: I_ADC.3 IC5.7 R29.1 | length 2332.5
  Top Layer w25: IC5.7 6332,7057 R29.1@6422,6967 ; I_ADC.3 6383,8335 v1(6387,8331) ; v1(6422,7159) R29.1@6422,6967 ; R29.1@6426,6963 R29.1@6422,6967
  Bottom Layer w25: v1(6387,8331) 6387,8131 6451,8067 6451,7606 6536,7521 6536,7273 v1(6422,7159)
NetIC1_2: IC1.2 SGN.9 | length 1087.2
  Top Layer w25: IC1.2 7557,7917 7957,8317 SGN.9
NetIC1_3: IC1.3 SGN.8 | length 1066.5
  Top Layer w25: IC1.3 7507,7952.75 7857,8302.75 SGN.8
NetIC1_4: IC1.4 SGN.7 | length 1045.8
  Top Layer w25: IC1.4 7457,8002.75 7757,8302.75 SGN.7
NetIC1_5: IC1.5 SGN.6 | length 1025
  Top Layer w25: IC1.5 7407,8052.75 7657,8302.75 SGN.6
NetIC1_6: IC1.6 SGN.5 | length 1004.3
  Top Layer w25: IC1.6 7357,8098.75 7557,8298.75 SGN.5
NetIC1_7: IC1.7 SGN.4 | length 983.6
  Top Layer w25: IC1.7 7307,8151.75 7457,8301.75 SGN.4
NetIC1_8: IC1.8 SGN.3 | length 962.9
  Top Layer w25: IC1.8 7257,8202.75 7347.12,8292.88 7347.12,8690.12 SGN.3
NetIC1_9: IC1.9 R8.1 R9.2 SGN.2 | length 3144.5
  Top Layer w20: R8.1 R9.2 v1(5594,8779) ; v1(7255,8795) 7255,8696.58 SGN.2@7257,8694.58
  Top Layer w25: IC1.9 7209.5,7781.01 7209.5,8241.5 7257,8289 SGN.2@7257,8694.58
  Bottom Layer w20: v1(5594,8779) 5606,8779 5751,8924 7145,8924
  Bottom Layer w25: 7145,8924 v1@7257,8812
NetIC1_10: IC1.10 SGN.1 | length 921.5
  Top Layer w25: IC1.10 SGN.1
NetIC1_14: IC1.14 R7.2 | length 3249.3
  Top Layer w25: R7.2 5805,8575 6063,8833 6563,8833 6613,8783 6613,8258 6957,7914 IC1.14 IC1.14@6956.49,7778
NetIC1_15: IC1.15 R6.2 | length 3088
  Top Layer w25: v1(6738,7156) 6844,7156 6957,7269 IC1.15
  Top Layer w30: R6.2 4734,7232 v1(4813,7311)
  Bottom Layer w25: v1(4813,7311) 5987,7311 6078,7220 6078,6928 6156,6850 6540,6850 6738,7048 v1(6738,7156)
NetIC1_16: IC1.16 R5.2 | length 3369.2
  Top Layer w25: R5.2 4703,5953 6063,5953 6273,6163 6398,6163 6791,6556 6791,7021 7007,7237 IC1.16
NetIC1_19: IC1.19 R4.2 | length 5535.6
  Top Layer w25: R4.2 4718,7984 4718,8307 4936,8525 5875,8525 6123,8773 6523,8773 6556,8740 6556,8175 6662,8069 6662,6833 6705,6790 v1(6676,6790) ; v1(6989,6785) 6989,7018.29 6983,7024.29 7157,7198.29 IC1.19
  Bottom Layer w25: v1(6676,6790) 6976,6790 6985,6781 v1(6989,6785)
NetIC1_23: IC1.23 R2.2 | length 3497.9
  Top Layer w25: v1(6846,6475) 7004,6633 7193,6633 7266,6706 7266,7042 7357,7133 IC1.23
  Top Layer w30: R2.2 4700,6559 v1(4787,6472)
  Bottom Layer w25: v1@4787,6475 v1(6846,6475)
NetIC1_27: IC1.27 R1.2 | length 4477.9
  Top Layer w25: R1.2 4663,5240 4663,5673 4863,5873 6083,5873 6303,6093 6453,6093 6744,6384 7153,6384 7423,6654 7423,6787 7600,6964 7600,7086 7557,7129 IC1.27
NetIC2_1: IC2.1 R22.1 V_ADC.2 | length 2212.4
  Top Layer w25: IC2.1 7350,5281 7392,5323 7523,5323 7529,5329 7529,5476 7563,5510 7747,5510 7857,5620 R22.1@8098,5620 ; V_ADC.2 7908,4556 v1(7908,4683)
  Bottom Layer w25: v1(7522,5322) 7590,5322 7645,5267 7645,4881 7848,4881 7908,4821 v1(7908,4683)
NetIC2_2: IC2.2 R18.1 R22.2 | length 707.5
  Top Layer w25: IC2.2 7250,5318.19 7359,5427.19 R18.1 7435,5479 7571,5615 R22.2@7618,5615
NetIC2_3: IC2.3 R13.1 R16.1 | length 2845.8
  Top Layer w25: R16.1 6955,5793 7150,5598 ; IC2.3 7150,5598 ; R13.1@7618,5416 R13.1 7864,5416 7962,5514 8155,5514 8205,5564 8205,5687 8162.5,5729.5 7927,5729.5 7763.5,5893 7349,5893 7150,5694 7150,5598
NetIC2_5: IC2.5 R27.1 R30.1 | length 860.9
  Top Layer w25: R27.1@6602,5155 6602,5041 6830,4813 R30.1 6892,4674 IC2.5
NetIC2_6: IC2.6 R32.1 R36.2 | length 1294.9
  Top Layer w25: R32.1 R36.2 6415,5150 6513,5248 6664,5248 6711,5201 6711,5108 6907,4912 7117,4912 7150,4879 IC2.6
NetIC2_7: IC2.7 R36.1 V_ADC.3 | length 2384.8
  Top Layer w25: R36.1 6352,4774 6491,4913 6617,4913 6731,4799 6731,4632 6773,4590 7069,4590 7250,4771 IC2.7 ; v1(7800,4765) 7800,4558 V_ADC.3
  Bottom Layer w25: v1(7138,4662) 7406,4662 7556,4812 7753,4812 v1(7800,4765)
NetIC3_2: IC3.2 R38.1 R40.2 | length 835.9
  Top Layer w25: R40.2 5213.83,8378.45 R38.1 5503.28,8089 IC3.2
NetIC3_3: IC3.3 R35.1 R37.1 | length 434.4
  Top Layer w25: R35.1 R37.1 ; R37.1@5406,7989 IC3.3
NetIC4_1: IC4.1 R46.1 V_ADC.4 | length 4084
  Top Layer w20: v1(5631,4510) 5726,4415 7567,4415 V_ADC.4
  Top Layer w25: IC4.1 5434,5136 5586,5288 5696,5288 5763,5221 5763,5023 5887,4899 R46.1@5887,4712
  Bottom Layer w20: v1(5631,4510) 5745,4624 5745,5176 v1(5636,5285)
NetIC4_2: IC4.2 R44.1 R46.2 | length 869.4
  Top Layer w25: IC4.2 5334,5184 R44.1 5528,5378 5726,5378 5883,5221 R46.2
NetIC4_3: IC4.3 R39.1 R42.1 | length 2027.1
  Top Layer w25: R39.1 5631,5032 5565,4966 5266,4966 5234,4998 IC4.3 5234,5520 5332,5618 5966,5618 R42.1
NetIC5_2: IC5.2 R15.1 R20.2 | length 441.6
  Top Layer w25: R15.1 R15.1@5407,7043 ; R20.2 R15.1@5407,7043 ; IC5.2 5647,7059 5423,7059 R15.1@5407,7043
NetIC5_3: IC5.3 R12.1 R14.1 | length 566
  Top Layer w25: R12.1@5407,6548.55 R12.1 R14.1 5550,6955.91 5647.91,6955.91 IC5.3
NetIC5_5: IC5.5 R24.1 R25.1 | length 785.9
  Top Layer w25: R25.1 5407,6384 5565,6542 5634,6542 IC5.5
NetIC5_6: IC5.6 R26.1 R28.2 | length 1478.7
  Top Layer w25: R26.1 5516,6239 5516,6358 5598,6440 5710,6440 6117,6847 6117,6959 R28.2 ; IC5.6 6115,6957
NetL3.3V_2: L3.3V.2 R54.1 | length 158
  Top Layer w25: L3.3V.2 R54.1@8606,5080
NetL5V_2: L5V.2 R53.1 | length 122
  Top Layer w25: L5V.2 R53.1@8340,5043
NetL15V_2: L15V.2 R52.1 | length 569.2
  Top Layer w25: L15V.2 8048,6055 8290,5813 R52.1
NetL24V_2: L24V.2 R51.1 | length 143.7
  Top Layer w25: L24V.2 8777,8679 R51.1
NetLM317_1: LM317.1 VR1.1 | length 270
  Top Layer w25: VR1.1 LM317.1
NetQ1_1: Q1.1 R1.1 | length 208.4
  Top Layer w25: Q1.1@3951,5212 4158,5212 R1.1
NetQ1_3: Q1.3 Q4.2 R25.2 RS1.1 TP1.TP1 | length 3291.4
  Top Layer w25: Q1.3@3951,5412 3954,5415 Q1.3 3951,5686 4032,5767 4204,5767 4768,6331 R25.2 ; RS1.1 4563.85,5385.15 TP1.TP1@4568,5381
  Top Layer w78.74: 3752,5496 3833,5415 Q1.3 ; 3752,5919 3819.8,5986.8 Q4.2 ; Q1.3@3954,5415 4392.85,5415 RS1.1
  Top Layer w98.43: 3752,5496 3752,5919
NetQ2_1: Q2.1 R2.1 | length 208.7
  Top Layer w25: Q2.1@3951,6555.6 4157.4,6555.6 R2.1
NetQ2_3: Q2.3 Q5.2 R14.2 RS2.1 TP2.TP1 | length 2082.3
  Top Layer w25: 4341.45,6758.6 4536.6,6758.6 TP2.TP1 ; RS2.1 4629,6950 4771.09,6807.91 R14.2
  Top Layer w78.74: 3821.06,6810.94 3873.4,6758.6 Q2.3 4341.45,6758.6 RS2.1 ; 3821.06,7254 3821.06,7274.46 3877,7330.4 Q5.2
  Top Layer w82.68: 3821.06,6810.94 3821.06,7254
NetQ3_1: Q3.1 R4.1 | length 208.3
  Top Layer w25: Q3.1@3951,7899.2 4158.2,7899.2 R4.1
NetQ3_3: Q3.3 Q6.2 R37.2 RS3.1 TP3.TP1 | length 3014.7
  Top Layer w25: Q3.3 4102,8101 4496,7707 4717,7707 4926,7916 R37.2 ; TP3.TP1@4590.85,8071.85 RS3.1
  Top Layer w78.74: Q3.3 3814.17,8237.83 3814.17,8614.06 3814,8660 3826,8672 Q6.2
  Top Layer w82.68: 3847,8361 3852,8366 4458.85,8366 RS3.1 ; TP3.TP1 TP3.TP1@4590.85,8071.85
NetQ4_1: Q4.1 R5.1 | length 208.1
  Top Layer w25: Q4.1@3951,5883.8 4158.8,5883.8 R5.1
NetQ5_1: Q5.1 R6.1 | length 208.2
  Top Layer w25: Q5.1@3951,7227.4 4158.6,7227.4 R6.1
NetQ6_1: Q6.1 R7.1 | length 208.4
  Top Layer w25: Q6.1@3951,8571 4158,8571 R7.1
NetR11_1: R11.1 R12.2 | length 1015.8
  Top Layer w25: R12.2@4927,6543.55 4952.45,6543.55 5154,6342 5154,6210 5324,6040 5531,6040 R11.1
NetR16_2: R16.2 R17.2 R19.1 | length 372
  Top Layer w25: R19.1 R16.2 R17.2
NetR20_1: R20.1 R21.2 | length 279.6
  Top Layer w25: R20.1 R21.2
NetR23_1: R23.1 R24.2 | length 566.2
  Top Layer w25: R23.1@5620,6348 5891,6348 6099,6556 R24.2
NetR28_1: R28.1 R29.2 | length 186.7
  Top Layer w25: R28.1 6417,7439 R29.2@6421,7443
NetR30_2: R30.2 R31.2 R33.1 | length 402.7
  Top Layer w25: R33.1 6571,5344 R31.2 6825,5271 R30.2
NetR34_1: R34.1 R35.2 | length 734.9
  Top Layer w25: R35.2 5046.55,7664 R34.1
NetR40_1: R40.1 R41.2 | length 238.2
  Top Layer w25: R40.1 5643.45,8383.45 R41.2
NetR42_2: R42.2 R43.2 R45.1 | length 799
  Top Layer w25: R45.1 5603.41,5495.59 R42.2 5771,5495 R43.2
NetR49_1: R49.1 VR1.2 | length 452.4
  Top Layer w25: VR1.2 8929,5020 9058,4891 R49.1
U: L1.1 R26.2 RS1.2 | length 2362.9
  Top Layer w25: RS1.2 4709.15,6125 R26.2
  Top Layer w74.8: 3229.53,6115.9 3229.53,6075.31 3231,6076.79 v1(3231,6216)
  Top Layer w78.74: v1(4044,5587) 4169.15,5587 RS1.2
  Bottom Layer w78.74: v1(3231,6216) 3861,5586 4043,5586 v1(4044,5587)
U6RX: 
U6TX: 
V: L2.1 R15.2 RS2.2 | length 1931.7
  Top Layer w25: RS2.2 4265.15,7076 4672,7076 4741.72,7006.28 R15.2
  Top Layer w78.74: L2.1@3231.5,6775 3231.5,6777.28 3243,6788.79 v1(3243,6922) ; v1(3951,6946) 4135.15,6946 RS2.2
  Bottom Layer w78.74: v1(3243,6922) 3271,6950 3947,6950 v1(3951,6946)
W: L3.1 R38.2 RS3.2 | length 2449.8
  Top Layer w25: RS3.2 4197.15,8170.85 4564,7804 4683,7804 4783,7904 4783,8038.28 R38.2
  Top Layer w74.8: 3249.74,8390.69 3249.74,8350.53 3251,8351.79 v1(3251,8516)
  Top Layer w78.74: v1(4052,8240) 4191.15,8240 RS3.2
  Bottom Layer w78.74: v1(3251,8516) 3449.5,8317.5 3977.5,8317.5 3977.5,8314.5 v1(4052,8240)
pads on no net: IC1.17 IC1.21 IC1.25 IC3.5 IC3.6 IC3.7 IC4.5 IC4.6 IC4.7 U1.4

## Polygon pours and split planes (outlines as drawn)
GND on Top Layer "Bottom Layer-No Net" (solid, pour order 0): 2695,9281 2701,9287 9764,9287 9764,4292 9759,4287 9754,4292 2700,4292

## Silkscreen, mask and mechanical layers (free items; w line width, h text height)
Mechanical 1:
  the board outline again, w30

## Text inside footprints (layer, text, board x,y; h text height)
4: Top Overlay "1" at 8706,7597.86 h39.37 r270
220uF: Top Overlay "+" at 8108,6569 h40 r90
Buck1: Top Overlay "1" at 8989,6415.86 h39.37 r270
C1: Top Overlay "+" at 7652,7030 h40 r180
C2: Top Overlay "+" at 7337.5,7030 h40 r180
C3: Top Overlay "+" at 7023,7030 h40 r180
C4: Top Overlay "+" at 6729,8420 h40 r270
C5: Top Overlay "+" at 6847,8676 h40 r90
C8: Top Overlay "+" at 3181,5687 h40
C9: Top Overlay "+" at 3203,6350 h40
C10: Top Overlay "+" at 3200,7855 h40
C11: Top Overlay "+" at 6293,6273 h40
C13: Top Overlay "+" at 8060,5200 h40 r180
C17: Top Overlay "+" at 6340,7821 h40 r90
C19: Top Overlay "+" at 4753,4733 h40 r90
C22: Top Overlay "+" at 9059,5841 h40 r270
FUSE1: Top Overlay "3A" at 8942,7976 h196.85 r180